# Altium PCB PCB1.PcbDoc
Units mm, origin at the board's own origin, x right, y up, seen from the top; angles counter-clockwise.
Board outline 41.25 x 41.25 mm, 4 copper layers (first layer (signal), second layer (GND), third layer (GND), fourth layer (signal)), stack 1.57 mm thick; 35 components, 27 nets, 170 pads, 130 vias.
Unrouted connection lines stored in the file: 6.
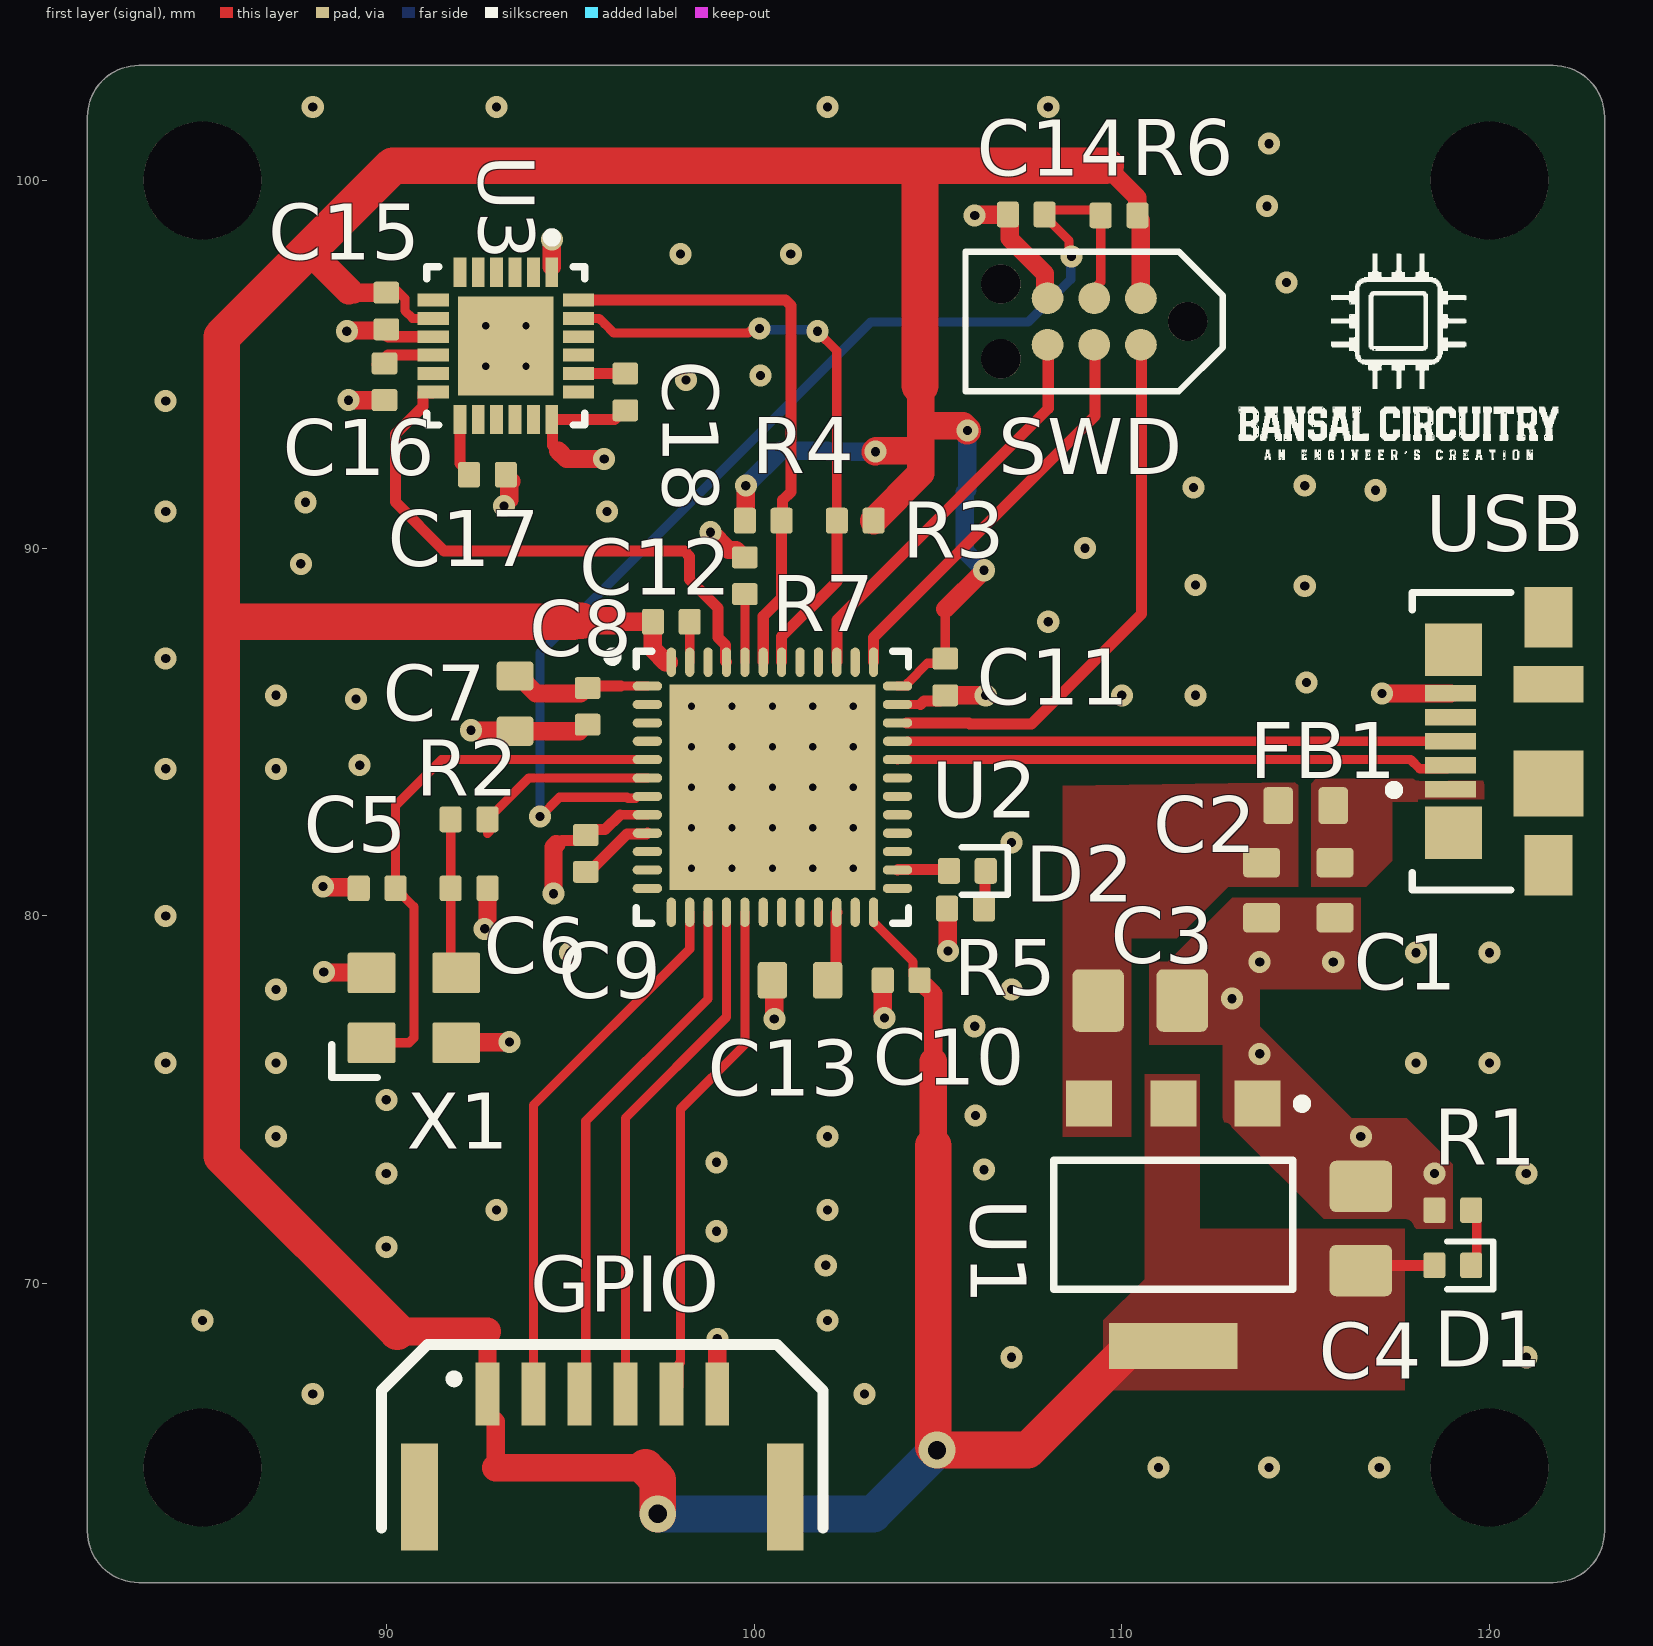
[diagram p0: first layer (signal) view]
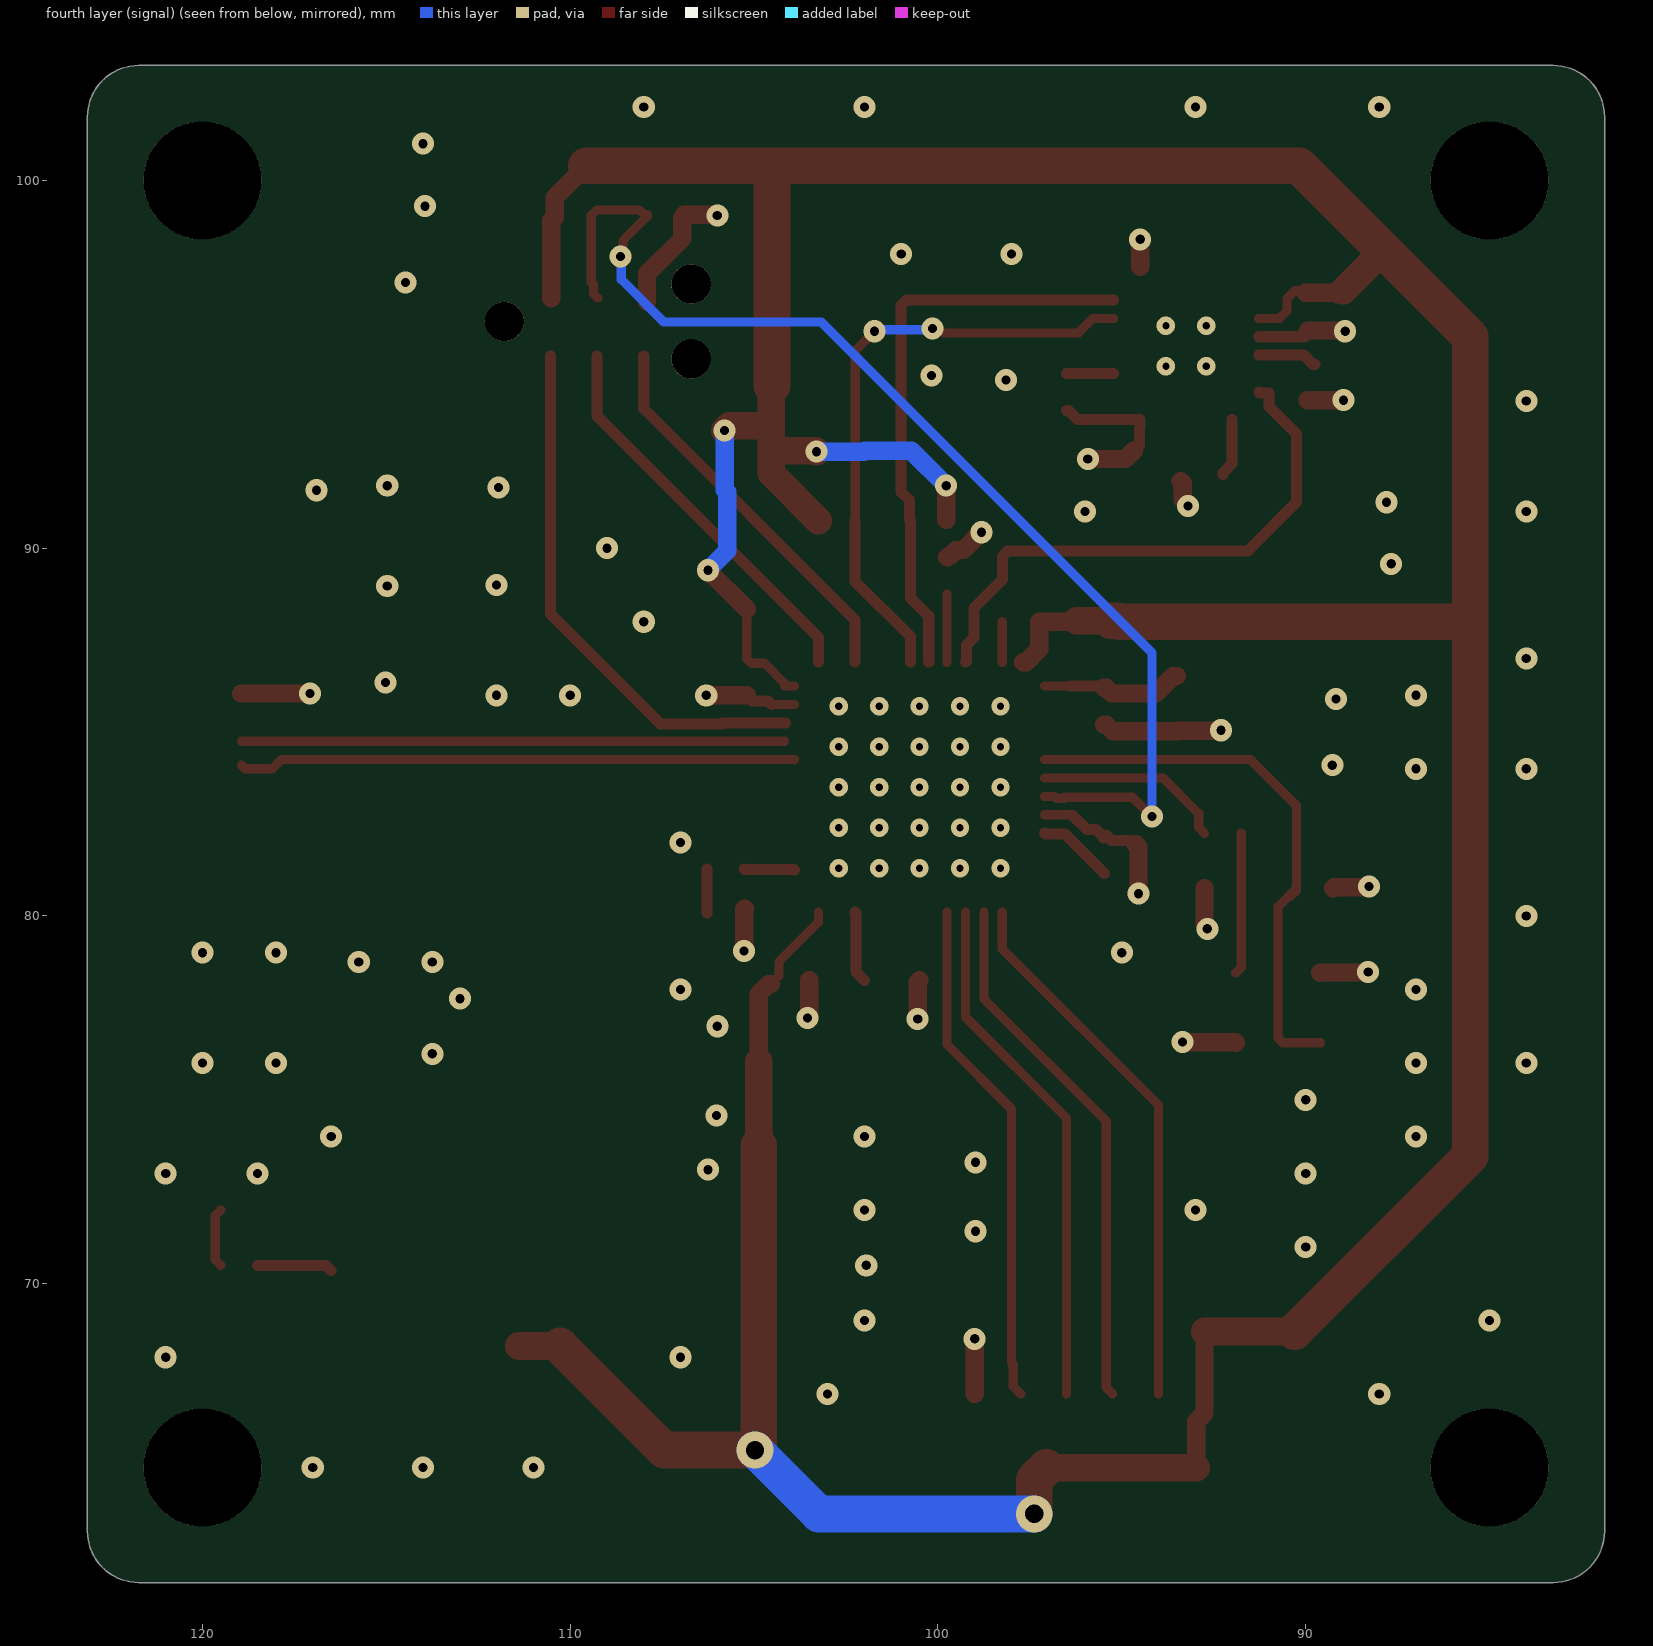
[diagram p1: fourth layer (signal) view, seen from below]
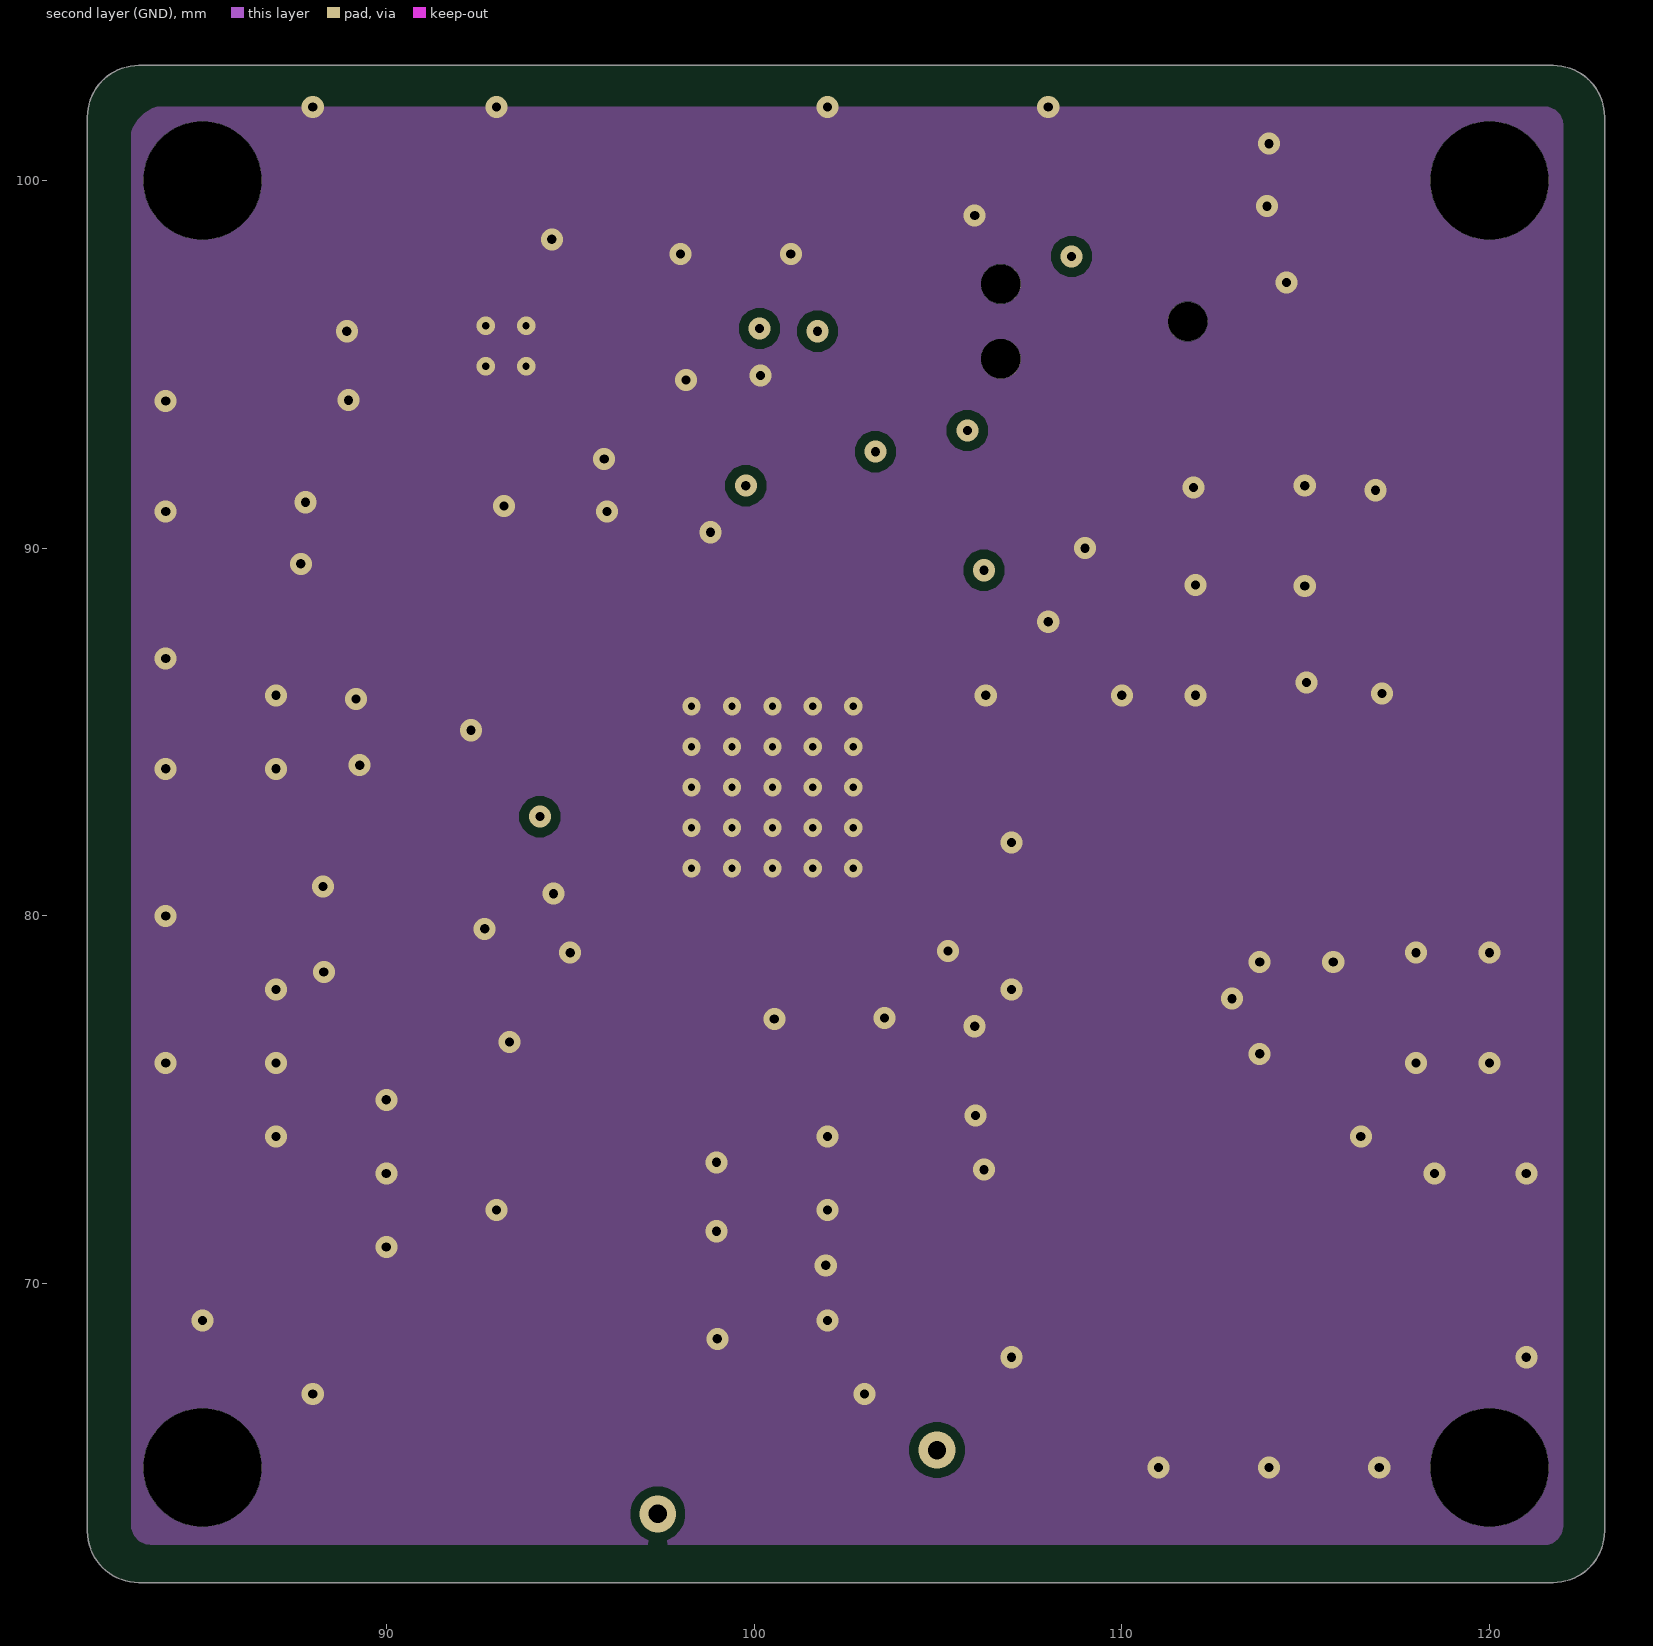
[diagram p2: second layer (GND)]
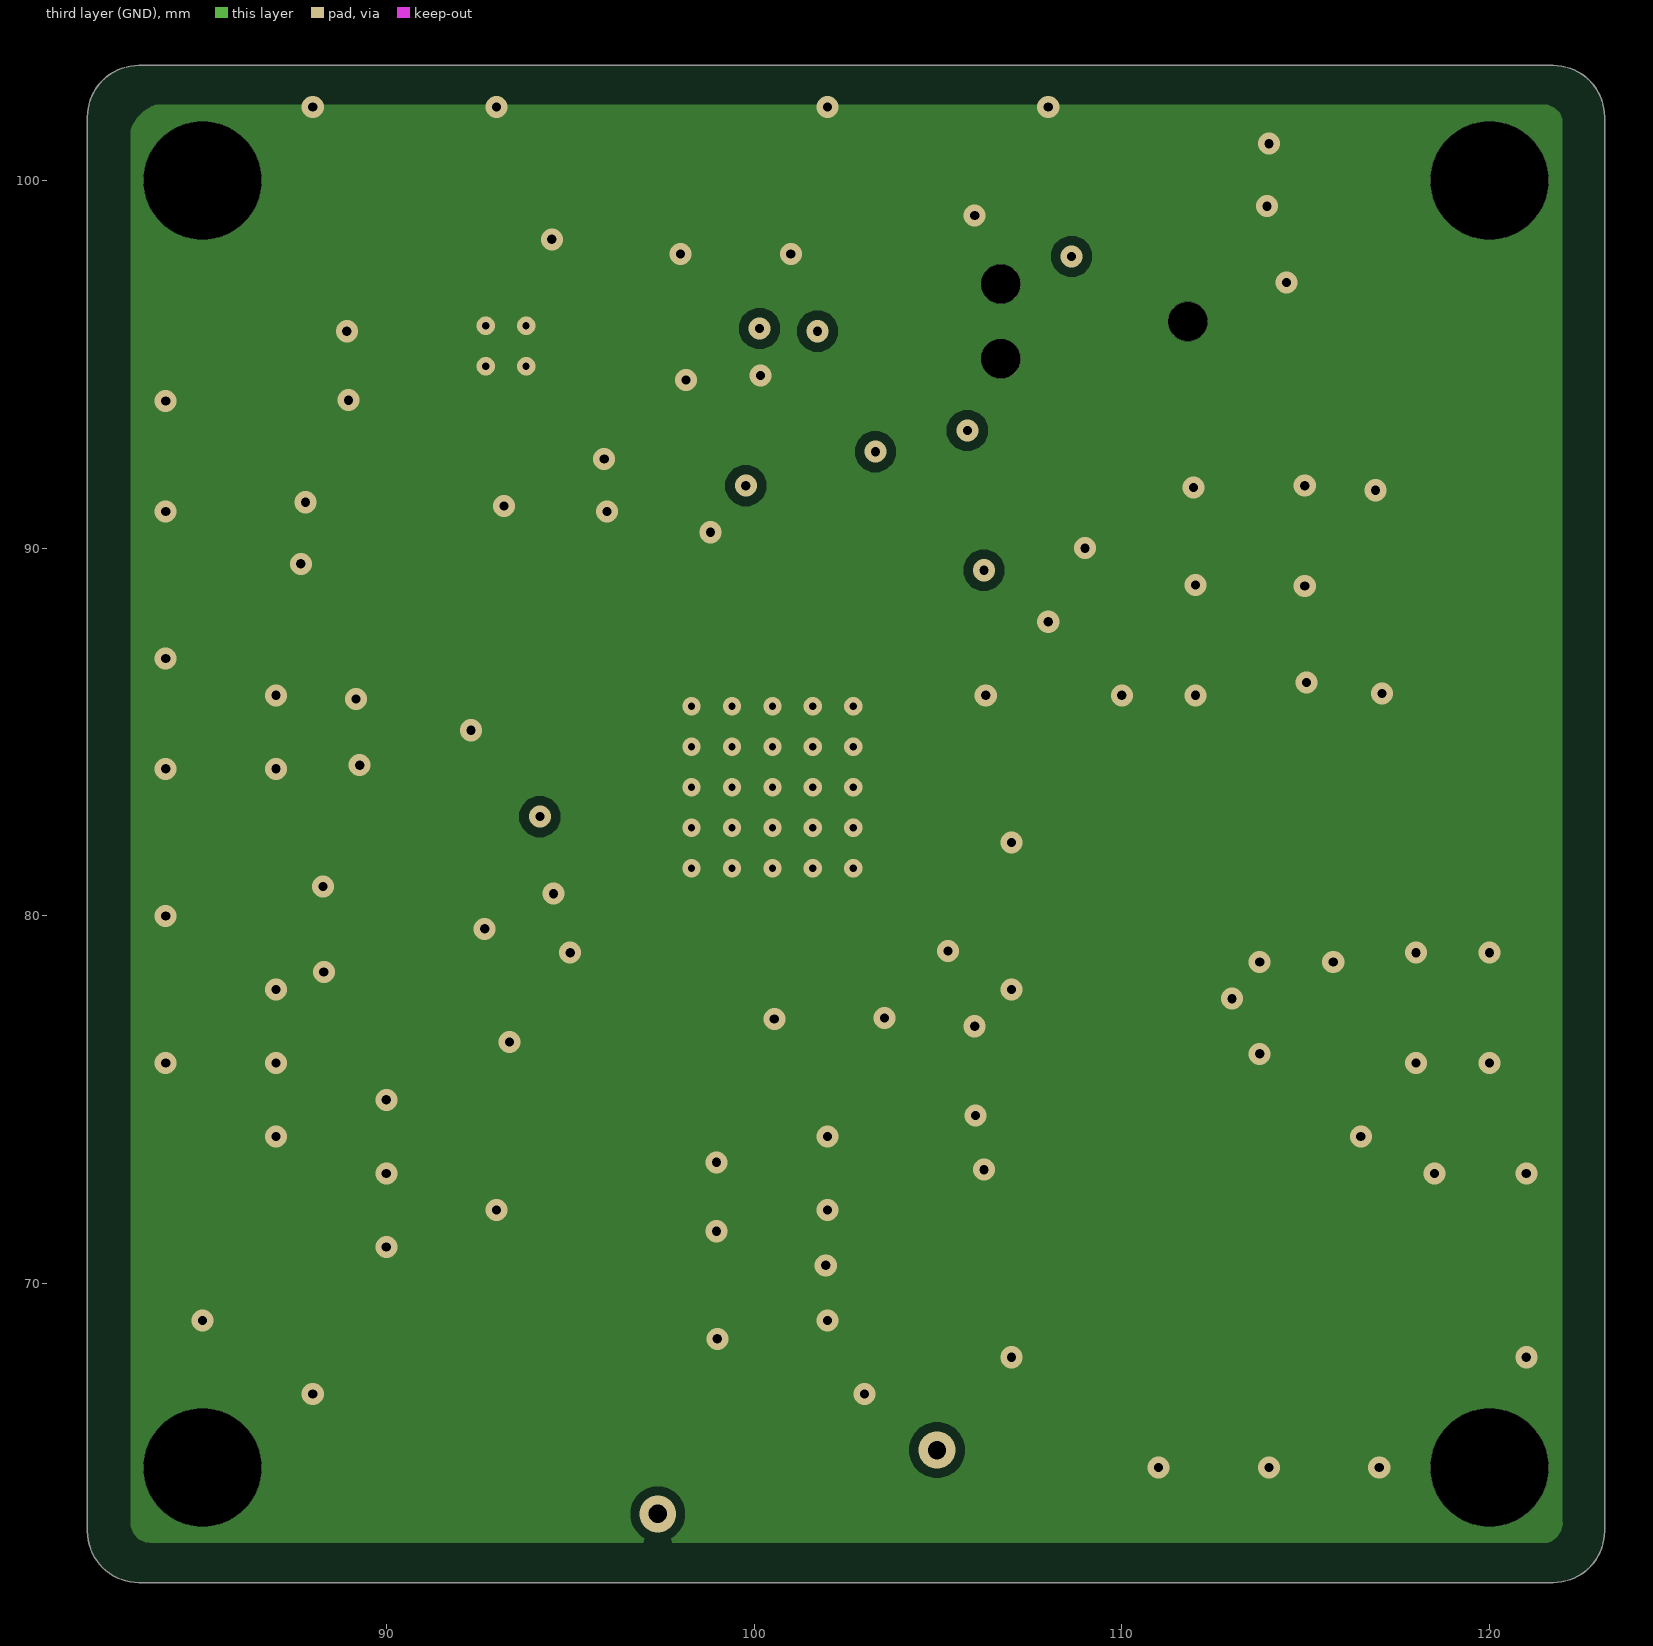
[diagram p3: third layer (GND)]
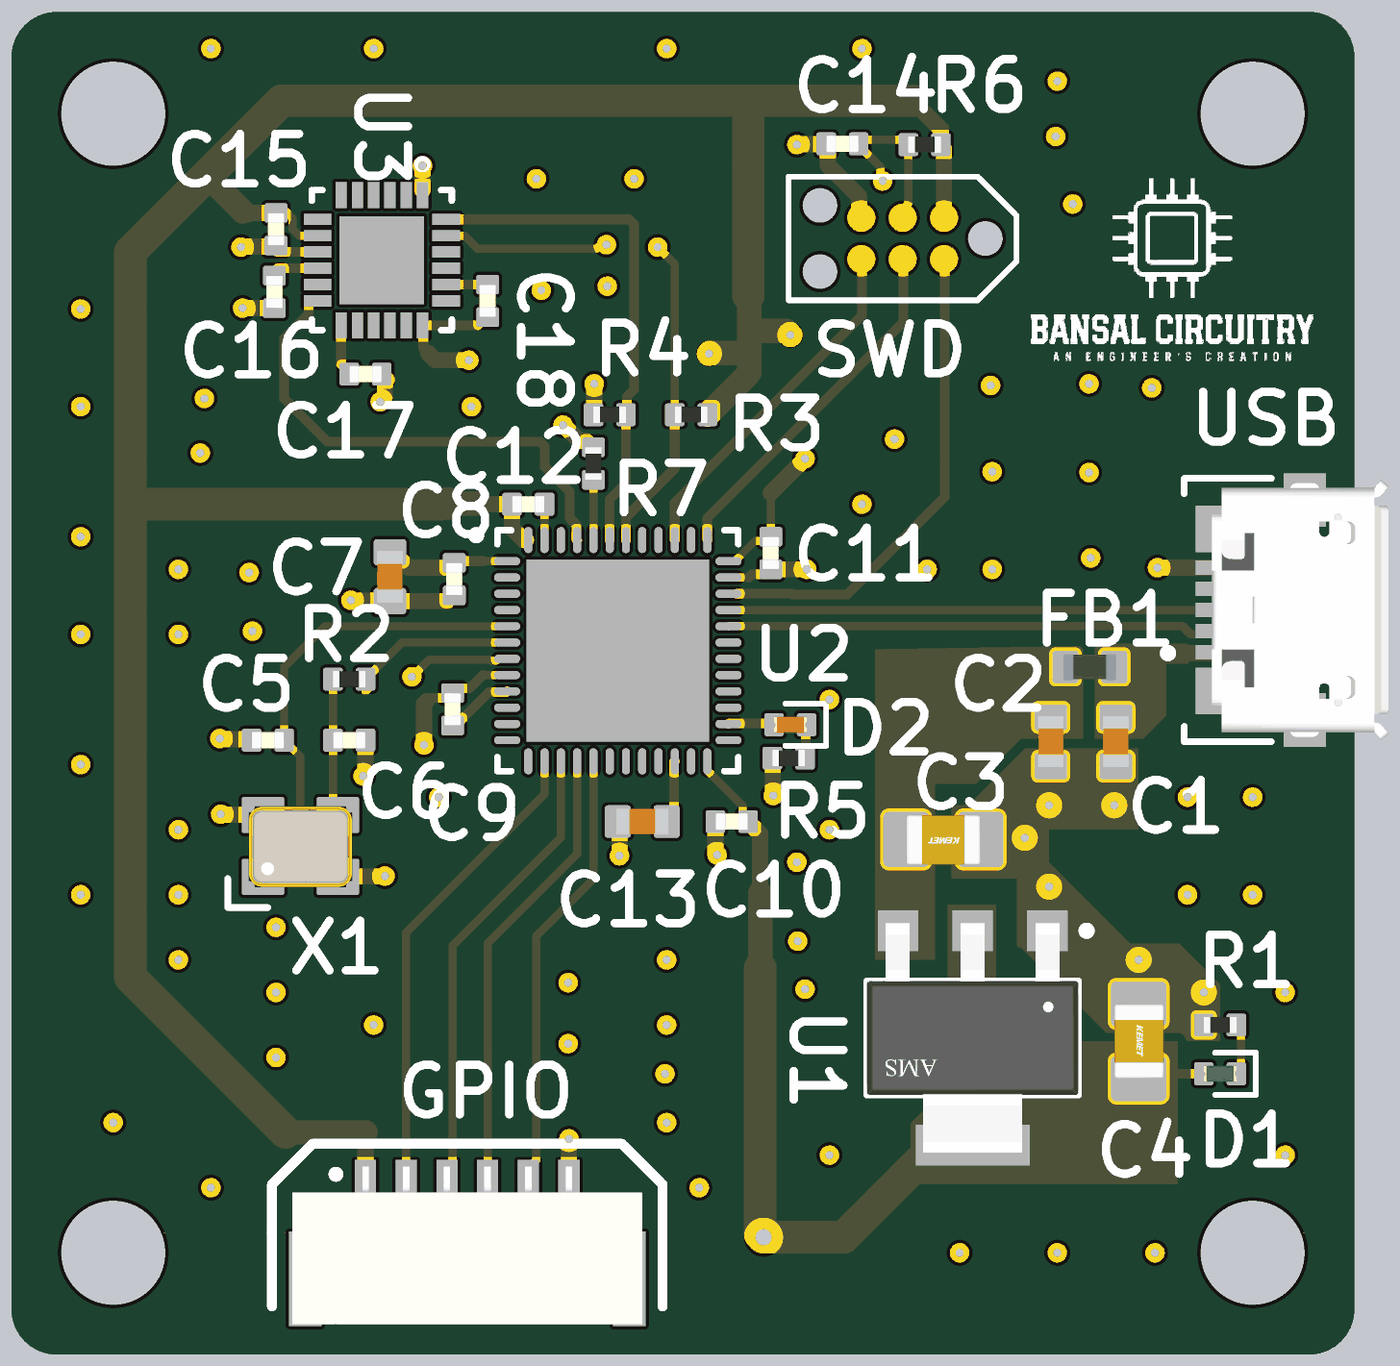
[diagram p4: 3D render of the assembled board from above, using the file's embedded part models]

## Layer stack, top to bottom
Top Solder: solder mask 0.0254, SM-001, Dk 4
first layer (signal): signal copper 0.035
Dielectric 1: prepreg 0.2, PP-017, Dk 4.6
second layer (GND): signal copper 0.0175
Dielectric 3: core 1.065, Core-039, Dk 4.6
third layer (GND): signal copper 0.0175
Dielectric 5: prepreg 0.2, PP-017, Dk 4.6
fourth layer (signal): signal copper 0.035
Bottom Solder: solder mask 0.0254, SM-001, Dk 4

## Board outline
81.873,63.27 81.873,101.586 81.873,101.73 cw(c83.27,101.73) 83.27,103.127 121.73,103.127 cw(c121.73,101.73) 123.127,101.73 123.127,63.27 cw(c121.73,63.27) 121.73,61.873 83.27,61.873 cw(c83.27,63.27)

## Design rules (kind name [scope] priority, off if disabled: settings)
Clearance Clearance_1 [All] p1: gap=0.2 ignorepadtopadclearanceinfootprint=FALSE except(0: THPad-Hole Via-Hole Fill-Hole Poly-Hole Region-Hole Hole-Hole; 0.254: THPad-THPad THPad-Via THPad-Fill THPad-Poly THPad-Region Via-Via Via-Fill Via-Poly Via-Region Fill-Fill Fill-Poly Fill-Region Poly-Poly Poly-Region Region-Region)
Clearance Clearance_1 [(ExistsOnLayer('second layer (GND)') Or ExistsOnLayer('third layer (GND)')) vs (ExistsOnLayer('second layer (GND)') Or ExistsOnLayer('third layer (GND)'))] p2: gap=0.254 ignorepadtopadclearanceinfootprint=FALSE sourcerule=40 cellrowname=All cellrowtype=0 cellcolname=All cellcoltype=0 innerlayers=TRUE
Clearance Clearance_2 [(ExistsOnLayer('first layer (signal)') Or ExistsOnLayer('fourth layer (signal)')) vs (ExistsOnLayer('first layer (signal)') Or ExistsOnLayer('fourth layer (signal)'))] p3: gap=0.254 ignorepadtopadclearanceinfootprint=FALSE sourcerule=40 cellrowname=All cellrowtype=0 cellcolname=All cellcoltype=0 outerlayers=TRUE
Clearance [All] p4: gap=0.254 ignorepadtopadclearanceinfootprint=FALSE ismatrix=TRUE
DiffPairsRouting DifferentialPairsRouting_2 [All] p1: maxlimit=0.254 minlimit=0.208 mostfreqgap=0.254 toplayer_maxgap=0.208 toplayer_prefgap=0.208 toplayer_minwidth=0.264 toplayer_maxwidth=0.264 toplayer_prefwidth=0.264 bottomlayer_maxgap=0.208 bottomlayer_prefgap=0.208 bottomlayer_minwidth=0.264 bottomlayer_maxwidth=0.264 bottomlayer_prefwidth=0.264 impedanceprofiledriven=TRUE impedanceprofileid={7BBD9D1F-3048-41EA-9518-500ADC09A924} impedanceprofilevalue=90.000000 maxuncoupledlength=0.254
DiffPairsRouting [All] p2: maxlimit=0.254 minlimit=0.254 mostfreqgap=0.254 toplayer_minwidth=0.381 toplayer_maxwidth=0.381 toplayer_prefwidth=0.381 midlayer1_minwidth=0.381 midlayer1_maxwidth=0.381 midlayer1_prefwidth=0.381 midlayer2_minwidth=0.381 midlayer2_maxwidth=0.381 midlayer2_prefwidth=0.381 bottomlayer_minwidth=0.381 bottomlayer_maxwidth=0.381 bottomlayer_prefwidth=0.381 maxuncoupledlength=12.7
PolygonConnect [All] p1: connectstyle=Direct reliefconductorwidth=0.254 reliefentries=4 polygonreliefangle="90 Angle" airgapwidth=0.254
RoomDefinition Sheet1 [InComponentClass('Sheet1')] p1: confinementstyle=ConfineIn formatcopy=TRUE lockcomponents=FALSE outline 276.5,42.5 466.365,42.5 466.365,57.74 276.5,57.74
RoutingVias RoutingViaStyle_1 [All] p1: holewidth=0.3 width=0.7 viastyle="Through Hole" minholewidth=0.25 minwidth=0.55 maxholewidth=0.4 maxwidth=0.9
RoutingVias [All] p2: holewidth=0.711 width=1.27 viastyle="Through Hole" minholewidth=0.711 minwidth=1.27 maxholewidth=0.711 maxwidth=1.27
SolderMaskExpansion [All] p1: expansion=0.102 istentingtop=FALSE
Width MaxMinWidth_1 [All] p1: maxlimit=1 minlimit=0.25 preferedwidth=0.3 minimp=50.000000 maximp=50.000000 favimp=50.000000
29 further rules are at their usual default settings.

## Components (designator, comment, footprint, x,y, rotation, side; value= is the part's Value field where it differs from the comment)
C1 "2.2uf" CAP_0603 115.8,80.7 r90 top
C2 "2.2uf" CAP_0603 113.8,80.7 r90 top
C3 "22uf" CAP_0805 110.5,77.7 r180 top
C4 "22uf" CAP_0805 116.5,71.5 r270 top
C5 "5pf" CAP_0402 89.75,80.75 r0 top
C6 "5pf" CAP_0402 92.25,80.75 r180 top
C7 "2.2uf" CAP_0603 93.5,85.775 r90 top
C8 "100nf" CAP_0402 95.475,85.7 r90 top
C9 "100nf" CAP_0402 95.425,81.7 r270 top
C10 "100nf" CAP_0402 104,78.25 r0 top
C11 "100nf" CAP_0402 105.2,86.5 r90 top
C12 "100nf" CAP_0402 97.75,88 r180 top
C13 "2.2uf" CAP_0603 101.25,78.25 r0 top
C14 "100nf" CAP_0402 107.4,99.075 r0 top
C15 "100nf" CAP_0402 90,96.45 r90 top
C16 "100nf" CAP_0402 89.95,94.525 r90 top
C17 "10nf" CAP_0402 92.75,92 r180 top
C18 "2.2nf" CAP_0402 96.5,94.25 r90 top
D1 "GREEN" LED_0402_GREEN 119,70.5 r0 top
D2 "RED" LED_0402_RED 105.8,81.225 r0 top
FB1 "FB0603" FB_0603 115,83 r180 top
GPIO "SM06B-GHS-TB" SM06B-GHS-TB 95.875,65.6 r0 top (schematic designator J3)
R1 "10K" RES_0402 119,72 r0 top
R2 "0R" RES_0402 92.25,82.625 r0 top
R3 "2.2K" RES_0402 102.75,90.75 r0 top
R4 "2.2K" RES_0402 100.25,90.75 r180 top
R5 "10K" RES_0402 105.75,80.2 r0 top
R6 "10k" RES_0402 109.925,99.05 r180 top
R7 "10k" RES_0402 99.75,89.25 r90 top
SWD "TC2030-NL" TC2030-NL-FP 109.25,96.166 r180 top (schematic designator J2)
U1 "AMS1117-3.3" FP-AMS1117-IPC_C 111.4,71.6 r270 top
U2 "STM32F411CEU6" STM-UFQFPN48_L 100.5,83.5 r0 top
U3 "MPU-6050" IS-QFN-24_V 93.25,95.5 r270 top
USB "473460001" FP-473460001-MFG 121.25,84.75 r90 top (schematic designator J1)
X1 "24MHz" XTAL_3225 90.75,77.5 r0 top

## Footprints (in the part's own frame and the unit in brackets; to place one, negate y for a bottom-side part, rotate by r counter-clockwise, add the part's x,y. Pads: shape width x height; smd on the part's side, far side on the other; paste and mask are expansions set on the pad)
CAP_0402 [mm]
  rrect25% 0.6x0.7 smd: 1(-0.5,0) 2(0.5,0)
  body extent -0.5,-0.26 0.5,0.26, height 0.37
CAP_0603 [mm]
  rrect25% 0.8x1 smd: 1(-0.75,0) 2(0.75,0)
  body extent -0.8,-0.4 0.8,0.4, height 0.51
CAP_0805 [mm]
  rrect25% 1.4x1.7 smd: 1(-1.143,0) 2(1.143,0)
  body extent -1.15,-0.76 1.15,0.79, height 1.01
FB_0603 [mm]
  rrect25% 0.8x1 smd: 1(-0.75,0) 2(0.75,0)
  body extent -0.8,-0.4 0.8,0.4, height 0.81
FP-473460001-MFG [mm]
  rect 0.45x1.38 smd paste+0 mask+0: 1(-1.3,2.31) 2(-0.65,2.31) 3(0,2.31) 4(0.65,2.31) 5(1.3,2.31)
  rect 1.425x1.55 smd paste+0 mask+0: 6(-2.488,2.225) 7(2.488,2.225)
  rect 1.65x1.3 smd paste+0 mask+0: 8(-3.375,-0.35) 11(3.375,-0.35)
  rect 1.8x1.9 smd paste+0 mask+0: 9(-1.15,-0.35)
  rect 1x1.9 smd paste+0 mask+0: 10(1.55,-0.35)
  silkscreen extent -4.05,0.67 4.05,3.97, body extent -4.3,-2.48 4.3,3.45, height 0.25
FP-AMS1117-IPC_C [mm]
  rect 1.25x1.25 smd paste+0 mask+0: 1(-3.295,2.29) 2(-3.295,0) 3(-3.295,-2.29)
  rect 1.25x3.5 smd paste+0 mask+0: 4(3.295,0)
  silkscreen extent -3.42,-3.25 1.75,3.63, body extent -3.9,-3.35 3.9,3.35, height 0.25
IS-QFN-24_V [mm] "QFN, 24-Leads, Body 4x4mm, Pitch 0.5mm, Thermal Pad 2.7x2.6mm"
  rect 0.8x0.35 smd: 1(-2,1.25) 2(-2,0.75) 3(-2,0.25) 4(-2,-0.25) 5(-2,-0.75) 6(-2,-1.25) 13(2,-1.25) 14(2,-0.75) 15(2,-0.25) 16(2,0.25) 17(2,0.75) 18(2,1.25)
  rect 0.35x0.85 smd mask+0.102: 7(-1.25,-1.975) 8(-0.75,-1.975) 9(-0.25,-1.975) 10(0.25,-1.975) 11(0.75,-1.975) 12(1.25,-1.975) 19(1.25,1.975) 20(0.75,1.975) 21(0.25,1.975) 22(-0.25,1.975) 23(-0.75,1.975) 24(-1.25,1.975)
  rect 2.7x2.6 smd: 25(0,0)
  silkscreen extent -3.07,-2.15 2.15,2.15, body extent -2,-2 2,2, height 0.95
LED_0402_GREEN [mm]
  rrect25% 0.6x0.7 smd: A(-0.5,0) K(0.5,0)
  silkscreen extent -0.15,-0.65 1.1,0.65, body extent -0.51,-0.25 0.51,0.25, height 0.45
LED_0402_RED [mm]
  rrect25% 0.6x0.7 smd: A(-0.5,0) K(0.5,0)
  silkscreen extent -0.15,-0.65 1.1,0.65, body extent -0.51,-0.25 0.51,0.25, height 0.45
RES_0402 [mm]
  rrect25% 0.6x0.7 smd: 1(-0.5,0) 2(0.5,0)
  body extent -0.5,-0.25 0.5,0.25, height 0.3
SM06B-GHS-TB [mm]
  rect 0.65x1.7 smd: 1(-3.125,1.4) 2(-1.875,1.4) 3(-0.625,1.4) 4(0.625,1.4) 5(1.875,1.4) 6(3.125,1.4)
  rect 1x2.9 smd: ""(-4.975,-1.4) ""(4.975,-1.4)
  silkscreen extent -6,-2.25 6,2.75, body extent -5.38,-2.8 5.38,2.05, height 4.26
STM-UFQFPN48_L [mm] "QFN, 48-Leads, Body 7.1x7.1mm, Pitch 0.5mm, Thermal Pad 5.6x5.6mm, IPC High Density"
  oval 0.8x0.25 smd: 1(-3.4,2.75) 2(-3.4,2.25) 3(-3.4,1.75) 4(-3.4,1.25) 5(-3.4,0.75) 6(-3.4,0.25) 7(-3.4,-0.25) 8(-3.4,-0.75) 9(-3.4,-1.25) 10(-3.4,-1.75) 11(-3.4,-2.25) 12(-3.4,-2.75) 25(3.4,-2.75) 26(3.4,-2.25) 27(3.4,-1.75) 28(3.4,-1.25) 29(3.4,-0.75) 30(3.4,-0.25) 31(3.4,0.25) 32(3.4,0.75) 33(3.4,1.25) 34(3.4,1.75) 35(3.4,2.25) 36(3.4,2.75)
  oval 0.25x0.8 smd: 13(-2.75,-3.4) 14(-2.25,-3.4) 15(-1.75,-3.4) 16(-1.25,-3.4) 17(-0.75,-3.4) 18(-0.25,-3.4) 19(0.25,-3.4) 20(0.75,-3.4) 21(1.25,-3.4) 22(1.75,-3.4) 23(2.25,-3.4) 24(2.75,-3.4) 37(2.75,3.4) 38(2.25,3.4) 39(1.75,3.4) 40(1.25,3.4) 41(0.75,3.4) 42(0.25,3.4) 43(-0.25,3.4) 44(-0.75,3.4) 45(-1.25,3.4) 46(-1.75,3.4) 47(-2.25,3.4) 48(-2.75,3.4)
  rect 5.6x5.6 smd: 49(0,0)
  silkscreen extent -4.47,-3.7 3.7,3.7, body extent -3.55,-3.55 3.55,3.55, height 0.6
TC2030-NL-FP [mil]
  round 33.98 smd paste-16.99: 1(-50,-25) 2(-50,25) 3(0,-25) 4(0,25) 5(50,-25) 6(50,25)
  round 42.01 hole 42.01 unplated: MH(-100,0) MH(100,-40) MH(100,40)
  silkscreen extent -138,-75 138,75
XTAL_3225 [mm]
  rrect10% 1.3x1.1 smd: 1(-1.15,-0.95) 2(1.15,-0.95) 3(1.15,0.95) 4(-1.15,0.95)
  silkscreen extent -2.23,-1.89 -1,-1, body extent -1.6,-1.28 1.6,1.22, height 0.61

## Part data
C1 C2 C7 C13: library part CAP_0603, "Capacitor SMD 0603"
C3 C4: library part CAP_0805, "Capacitor SMD 0805"
C5 C6 C8 C9 C10 C11 C12 C14 C15 C16 C17 C18: library part CAP_0402, "Capacitor SMD 0402"
D1: library part LED_0402_GREEN, "LED 0402 GREEN SMD"
D2: library part LED_0402_RED, "LED 0402 RED SMD"
FB1: library part FB_0603, "Ferrite Bead SMD 0603"
GPIO: "Header Connector 6 Position 1.25MM Pitch SMD Horizontal JST GH", Manufacturer=JST, Manufacturer Part Number=SM06B-GHS-TB
R1 R2 R3 R4 R5 R6 R7: library part RES_0402, "Resistor SMD 0402"
SWD: "Tag-Connect No-Solder SWD Debug Connector (No Legs) DO NOT PLACE", Manufacturer=Tag-Connect, Manufacturer Part Number=TC2030-NL-FP
U1: library part CMP-209535-000001-1, "LDO Voltage Regulators 1A, 3.3V", Dropout Voltage=1.1V, Manufacturer="Advanced Monolithic Systems", Max Junction Temp=+125°C, Max Power Dissipation=1.2W, Max Supply Voltage=15V, Nominal Supply Current=5mA, Output Current=1A, Output Voltage=3.3V, Package=AMS1117, Temperature="-40°C to +125°C", Temperature Range Low=-40°C, Automotive=No, Category=IC, ComponentLink2Description=Datasheet, ComponentLink2URL=http://www.advanced-monolithic.com/pdf/ds1117.pdf, Device Class L1="Integrated Circuits (ICs)", Device Class L2="Power Management ICs", Device Class L3="Voltage Regulators - Linear", Height=1.8mm, Ipc Land Pattern Name=SOT229P700X180-4, Lead Free=Yes, Manufacturer Part Number=AMS1117-3.3, Number Of Outputs=1, Octopart=https://octopart.com/ams1117-3.3-advanced+monolithic+systems-25899300, Output Type=Fixed, RoHS=TRUE, Standoff Height=0.64mm, Temperature Range High=+125°C
U2: library part CMP-0243-00165-1, "ARM Cortex-M4 32-bit MCU+FPU, 512 KB Flash, 128 KB RAM, 36 I/Os, 48-Pin UFQFPN, -40 to 85 degC, Tray", I/Os (High Current)=36, Operating Frequency(F) (Processor speed) (MHz)=100, Package Description=UFQFPN48, Package Reference="48-Pin Ultra Thin Fine Pitch Quad Flat No-Lead, 7 x 7 x 0.6 mm Body, 0.5 mm Pitch, Exposed Pad", Supply Voltage(Vcc) min (V)=1.7, ComponentLink1Description="Manufacturer URL", ComponentLink1URL=http://www.st.com/, ComponentLink2Description=Datasheet, ComponentLink2URL=http://www.st.com/st-web-ui/static/active/en/resource/technical/document/datasheet/DM00115249.pdf, Core="ARM Cortex-M4", DatasheetVersion="Rev. 6", FLASH Size (Prog) (kB)=512, Internal RAM Size (kB)=128, Mounting Technology="Surface Mount", Packing=Tray
U3: library part CMP-1753-00002-2, "3-Axis Gyroscope, Accelerometer and a Digital Motion Processor(TM) (DMP), 2.375 to 3.46 V, -40 to 85 degC, 24-Pin QFN, RoHS, Tape and Reel", Manufacturer=InvenSense, Standard Package=5,000, Category=Sensors,Transducers, Datasheet URL=http://datasheet.octopart.com/MPU-6050-InvenSense-datasheet-14421344.pdf, Datasheet Version="Rev. 3.3, 05/2012", Dynamic Catalog=MPU-6000™Series, Family=Multifunction, Featured Product=MPU-60506-Axis,IntegratedI²CSolution, Manufacturer URL=http://www.invensense.com/, Online Catalog=MPU-6000™Series, Other Names="1428-1007-2 / MPU6050", Output Type=Digital, Sensor Type=MotionTracking, Unit PriceUSD=Digital
USB: library part CMP-2000-05246-2, "CONN RCPT USB2.0 MICRO B SMD R/A", Current Rating=1.8A, Manufacturer=Molex, Package=0, Temperature="-30°C to +85°C", Temperature Range High=+85°C, Temperature Range Low=-30°C, Voltage Rating=30V, Automotive=No, Category=Conn, ComponentLink2Description=Datasheet, ComponentLink2URL=https://www.molex.com/webdocs/datasheets/pdf/en-us/0473460001_IO_CONNECTORS.pdf, Conn Orientation="Right Angle", Contact Material=Gold,Nickel, Device Class L1=Connectors, Device Class L2="USB Connectors", Device Class L3=unset, Digikey Description="CONN RCPT USB2.0 MICRO B SMD R/A", Footprint Url=https://www.molex.com/pdm_docs/sd/473460001_sd.pdf, Height=2.945mm, Is Female=yes, Lead Free=Yes, Manufacturer Part Number=473460001, Number Of Contacts=5, Octopart=https://octopart.com/47346-0001-molex-7164928, Pitch=0.65mm, RoHS=TRUE, Shielding=true, Usb Standard="USB 2.0"
X1: library part TSX-3225_24.0000MF15X-AC, "Crystal SMD 24MHz 10PPM 7pF 3225", Manufacturer=Epson, Manufacturer Part Number="TSX-3225 24.0000MF15X-AC"

## Free pads (board coordinates)
  round 3.2 hole 3.2 unplated: MH(85,65) MH(85,100) MH(120,65) MH(120,100)

## Via types
v1: diameter 0.6, hole 0.25, first layer (signal) to fourth layer (signal), 99 vias
v2: diameter 0.5, hole 0.2, first layer (signal) to fourth layer (signal), 29 vias
v3: diameter 1, hole 0.5, first layer (signal) to fourth layer (signal), 2 vias

## Nets (pads, with @x,y where several pads share a name; then routed paths per layer and width w, separated by ;. In a path a pad name is that pad's centre, name@x,y a point inside that pad or via, vN(x,y) a via of type N, cw(c..) or ccw(c..) an arc to the next point about the centre after c; other vN are vias at no path point)
3.3v: C4.2 C7.2 C8.2 C9.2 C10.2 C11.2 C12.2 C15.2 C17.2 D1.A GPIO.1 R3.2 R4.2 R6.1 SWD.1 U1.2 U1.4 U2.1 U2.9 U2.24 U2.36 U2.48 U3.8 U3.13 | length 155.2
  first layer (signal) w0.25: 89.125,96.9 89.175,96.95 ; C15.2@90.022,97 90.293,97 90.504,96.789 90.504,96.461 90.715,96.25 U3.8 ; 96.375,86.25 U2.1 ; U2.24 103.25,79.825 104.325,78.75 104.325,78.375 C10.2@104.55,78.15 ; U2.36 104.175,86.25 104.175,86.331 104.714,86.87 105.07,86.87 C11.2 105.2,88.345
  first layer (signal) w0.3: U3.13 92,92.3 92.25,92.05 C17.2 ; C9.2@95.471,81.154 96.542,82.225 97.075,82.225 U2.9 ; C8.2 95.525,86.25 96.375,86.25 ; C4.2 116.643,70.5 D1.A
  first layer (signal) w0.5: 87.85,98.075 87.9,98.075 ; 88.975,97 89.025,97 89.125,96.9 ; 89.175,96.95 C15.2 ; 92.75,68.7 GPIO.1 92.75,66.475 92.975,66.25 92.975,65 ; C7.2 93.6,86.525 94.075,86.05 95.275,86.05 95.425,86.2 C8.2 ; 96.25,88 C12.2 97.25,87.25 97.6,86.9 U2.48@97.675,86.9 ; R4.2@99.775,90.775 v1(99.775,91.7) ; C10.2@104.55,78.15 104.6,78.15 104.875,77.875 104.875,76.05 ; 105.2,88.345 106.25,89.395 v1(106.25,89.4) ; 109.556,100.4 110.425,99.531 R6.1 110.425,99 110.52,98.905 SWD.1
  first layer (signal) w0.75: 87.9,98.075 88.975,97 ; 90.3,68.7 92.75,68.7 ; 92.975,65 97.05,65 ; 95.3,88.025 96.225,88.025 ; R3.2 104.536,92.036 104.536,92.65 ; v1(103.3,92.625) 103.325,92.65 104.536,92.65 ; 104.536,94.4 104.536,93.325 ; 104.875,73.75 104.875,76.05 ; v1(105.8,93.2) 105.675,93.325 104.536,93.325 ; U1.4@110.275,68.305 U1.4 ; 104.536,92.65 104.536,93.325
  first layer (signal) w1: 90.3,68.7 85.525,73.475 85.525,88 ; 95.3,88.025 95.1,88.025 95.075,88 85.525,88 ; 97.05,65 97.381,64.669 v3(97.381,63.739) ; 104.511,94.425 104.511,100.4 ; 104.875,73.75 104.875,65.575 v3(104.975,65.475) 107.445,65.475 U1.4@110.275,68.305 ; 109.556,100.4 104.511,100.4 ; 85.525,88 85.525,95.75 87.85,98.075 90.175,100.4 104.511,100.4
  fourth layer (signal) w0.5: v1(99.775,91.7) 100.725,92.65 101.986,92.65 102.011,92.625 v1(103.3,92.625) ; v1(105.8,93.2) 105.8,91.592 105.725,91.517 105.725,89.936 106.25,89.411 v1(106.25,89.4)
  fourth layer (signal) w1: v3(97.381,63.739) 103.239,63.739 v3(104.975,65.475)
5V: C2.2 C3.2 FB1.2 U1.3
GND: C1.1 C2.1 C3.1 C4.1 C5.1 C6.1 C7.1 C8.1 C9.1 C10.1 C11.1 C12.1 C13.1 C14.1 C15.1 C16.1 C17.1 C18.1 GPIO.6 R1.1 R5.1 R7.2 SWD.5 U1.1 U2.8 U2.23 U2.35 U2.47 U2.49 U3.1 U3.9 U3.11 U3.18 U3.25 USB.5 X1.2 X1.4 | length 36.5
  first layer (signal) w0.25: 96.35,82.75 U2.8 ; U2.47 C12.1 ; U2.35 104.525,85.75
  first layer (signal) w0.3: C15.1@89.925,95.875 90.05,95.75 U3.9 ; C15.1@89.95,95.9 C15.1 ; 94.625,81.95 94.683,81.95 94.783,82.05 95.275,82.05 C9.1 ; 94.671,92.65 94.525,92.796 94.525,93.25 94.5,93.275 U3.18 96.2,93.5 96.45,93.75 C18.1 ; C9.1@95.5,82.125 95.5,82.15 95.7,82.35 95.95,82.35 96.35,82.75 ; 104.525,85.75 104.625,85.85 105.05,85.85 C11.1
  first layer (signal) w0.5: v1(88.275,80.8) 88.294,80.781 89.219,80.781 C5.1 ; v1(88.3,78.475) 88.313,78.462 89.587,78.462 X1.4 ; v1(88.925,95.9) 88.944,95.919 89.931,95.919 C15.1@89.95,95.9 ; v1(88.975,94.025) C16.1 ; X1.2 91.912,76.563 93.338,76.563 v1(93.35,76.575) ; v1(92.3,85.05) 92.313,85.038 93.488,85.038 C7.1 C8.1@95.25,85.025 ; v1(92.675,79.65) 92.675,79.677 92.75,79.752 C6.1 ; v1(93.2,91.15) 93.2,91.177 93.344,91.321 93.344,91.769 C17.1@93.4,91.824 ; U3.1@94.5,97.65 v1(94.5,98.4) ; v1(94.546,80.604) 94.546,81.871 94.625,81.95 ; 94.677,92.65 94.902,92.425 v1(95.925,92.425) ; C8.1@95.425,85.2 C8.1 ; v1(98.817,90.433) 98.824,90.433 99.308,89.95 99.5,89.95 99.65,89.8 99.7,89.8 R7.2 ; GPIO.6 v1(99,68.5) ; C13.1 100.55,78.2 v1(100.55,77.2) ; C10.1 103.5,77.302 103.55,77.252 v1(103.55,77.225) ; C11.1 v1(106.3,86) ; R5.1 105.262,80.188 105.262,79.062 v1(105.275,79.05) ; v1(106,99.05) 106.012,99.062 C14.1@106.9,99.062 ; C14.1@106.95,98.975 106.95,98.425 107.911,97.464 SWD.5@107.911,96.704 ; v1(117.077,86.05) USB.5
  other v1: 111,65 114,65 117,65 88,67 103,67 107,68 121,68 85,69 102,69 101.95,70.5 90,71 98.975,71.425 93,72 102,72 90,73 118.5,73 121,73 106.25,73.1 98.975,73.3 87,74 102,74 116.5,74 106.025,74.575 90,75 84,76 87,76 118,76 120,76 113.75,76.25 106,77 113,77.75 87,78 107,78 113.75,78.75 115.75,78.75 95,79 118,79 120,79 84,80 107,82 84,84 87,84 89.275,84.1 89.175,85.9 87,86 110,86 112,86 115.025,86.35 84,87 108,88 114.975,88.975 112,89 87.675,89.575 109,90 84,91 96,91 87.8,91.25 116.9,91.575 111.95,91.65 114.975,91.7 84,94 98.15,94.575 100.175,94.7 114.475,97.225 98,98 101,98 113.95,99.3 114,101 88,102 93,102 102,102 108,102
  other v2: 98.3,81.3 99.4,81.3 100.5,81.3 101.6,81.3 102.7,81.3 98.3,82.4 99.4,82.4 100.5,82.4 101.6,82.4 102.7,82.4 98.3,83.5 99.4,83.5 100.5,83.5 101.6,83.5 102.7,83.5 98.3,84.6 99.4,84.6 100.5,84.6 101.6,84.6 102.7,84.6 98.3,85.7 99.4,85.7 100.5,85.7 101.6,85.7 102.7,85.7 92.7,94.95 93.8,94.95 92.7,96.05 93.8,96.05
"IMU CPOUT": C18.2 U3.20 | length 1.3
  first layer (signal) w0.3: U3.20 C18.2
"IMU INT": U2.45 U3.12 | length 15.5
  first layer (signal) w0.3: U3.12 91.25,94.225 91,94.225 91,93.85 90.25,93.1 90.25,91.25 91.575,89.925 98.104,89.925 98.25,89.779 98.25,89.149 99.025,88.374 99.025,87.572 99.225,87.372 99.225,87.165 99.225,86.925 U2.45
"IMU REGOUT": C16.2 U3.10 | length 1.6
  first layer (signal) w0.3: C16.2@89.75,95 89.8,95 90.05,95.25 U3.10
"IMU SCL": R3.1 U2.42 U3.23 | length 16.6
  first layer (signal) w0.25: U3.23 95.785,96.25 95.936,96.099 96.185,95.85 99.843,95.85 99.901,95.908 100.083,95.908 v1(100.15,95.975) ; v1(101.725,95.9) 101.725,95.889 102.25,95.364 R3.1
  first layer (signal) w0.3: U2.42 100.75,87.6 102.25,89.1 R3.1
  fourth layer (signal) w0.25: v1(100.15,95.975) 100.188,95.937 101.688,95.937 v1(101.725,95.9)
"IMU SDA": R4.1 U2.43 U3.24 | length 15.8
  first layer (signal) w0.3: U3.24 100.854,96.75 101,96.604 101,91.525 100.779,91.304 R4.1@100.779,90.779 ; U2.43 100.25,88.149 100.261,88.159 100.75,88.649 R4.1
"MCU BOOT 0": R7.1 U2.44 | length 1.8
  first layer (signal) w0.25: U2.44 99.75,87.175 R7.1
"MCU LED A": D2.A U2.26 | length 1.4
  first layer (signal) w0.3: U2.26 103.912,81.263 105.263,81.263 D2.A@105.275,81.275
"MCU NRST": C14.2 R6.2 SWD.3 U2.7 | length 32.3
  first layer (signal) w0.25: v1(94.175,82.7) 94.184,82.7 94.709,83.225 96.547,83.225 96.572,83.2 96.775,83.2 96.825,83.25 U2.7 ; C14.2 107.9,99.025 108.567,98.358 108.567,98.001 v1(108.634,97.934) ; C14.2@107.95,99.025 108.125,99.2 109.275,99.2 R6.2 109.425,97.239 109.367,97.181 109.367,96.918 SWD.3
  fourth layer (signal) w0.25: v1(94.175,82.7) 94.175,87.15 103.175,96.15 107.453,96.15 108.612,97.309 108.612,97.913 v1(108.634,97.934)
"MCU OSC IN": C5.2 U2.5 X1.1 | length 15.3
  first layer (signal) w0.25: X1.1 90.618,76.55 90.75,76.682 90.75,80.25 C5.2 90.25,83 91.5,84.25 U2.5 ; C5.2@90.25,80.7 C5.2@90.425,80.525
"MCU OSC OUT": R2.2 U2.6 | length 5.2
  first layer (signal) w0.25: 92.75,82.25 92.908,82.408 92.908,82.783 93.875,83.75 U2.6
"MCU PA4": GPIO.2 U2.14 | length 14.9
  first layer (signal) w0.25: GPIO.2 94,74.85 98.25,79.1 U2.14
"MCU PA5": GPIO.3 U2.15 | length 14.5
  first layer (signal) w0.25: GPIO.3 95.425,67.175 95.425,74.425 98.75,77.75 U2.15
"MCU PA6": GPIO.4 U2.16 | length 14.2
  first layer (signal) w0.25: GPIO.4 96.5,74.5 99.25,77.25 U2.16
"MCU PA7": GPIO.5 U2.17 | length 13.9
  first layer (signal) w0.25: GPIO.5 97.95,67.2 97.95,67.807 98,67.857 98,74.75 99.75,76.5 U2.17
"MCU SWCLK": SWD.4 U2.37 | length 10.8
  first layer (signal) w0.3: U2.37 103.25,87.575 109.27,93.595 SWD.4@109.27,95.23
"MCU SWDIO": SWD.2 U2.34 | length 14.7
  first layer (signal) w0.3: U2.34@104.15,85.25 105.837,85.25 105.863,85.225 107.55,85.225 110.54,88.215 SWD.2@110.54,95.23
"MCU SWO": SWD.6 U2.39 | length 10.7
  first layer (signal) w0.3: U2.39 102.25,88.05 108,93.8 SWD.6@108,95.23
"MCU VCAP1": C13.2 U2.22 | length 2
  first layer (signal) w0.3: C13.2 102.225,78.475 102.225,80.075 U2.22
NetD1_K: D1.K R1.2 | length 1.6
  first layer (signal) w0.25: D1.K 119.65,70.65 119.65,71.85 R1.2
NetD2_K: D2.K R5.2 | length 1.2
  first layer (signal) w0.3: R5.2@106.275,80.075 D2.K@106.275,81.275
USB_D_N: U2.32 USB.2 | length 15.2
  first layer (signal) w0.254: U2.32 103.902,84.252 117.852,84.252 118.102,84.002 118.842,84.002 USB.2
USB_D_P: U2.33 USB.3 | length 14.8
  first layer (signal) w0.254: U2.33@104.173,84.748 USB.3@118.938,84.748
VBUS: C1.2 FB1.1 USB.1
"XTAL  IN": C6.2 R2.1 X1.3 | length 3.9
  first layer (signal) w0.25: 91.75,82.25 C6.2 91.75,78.6 X1.3
pads on no net: GPIO. SWD.MH U2.2 U2.3 U2.4 U2.10 U2.11 U2.12 U2.13 U2.18 U2.19 U2.20 U2.21 U2.25 U2.27 U2.28 U2.29 U2.30 U2.31 U2.38 U2.40 U2.41 U2.46 U3.2 U3.3 U3.4 U3.5 U3.6 U3.7 U3.14 U3.15 U3.16 U3.17 U3.19 U3.21 U3.22 USB.4 USB.6 USB.7 USB.8 USB.9 USB.10 USB.11

## Polygon pours and split planes (outlines as drawn)
5V on first layer (signal) "5V_L01_P002" (solid, pour order 2): 114.792,83.643 108.4,83.543 108.4,81.3 108.4,80.9 108.4,74 110.25,74 110.25,79.4 111.5,79.4 112.9,80.8 114.792,80.8
3.3v on first layer (signal) "3.3V_L01_P003" (solid, pour order 3): 110.625,75.7 110.625,70.125 109.5,69 109.5,67.1 117.7,67.1 117.7,71.5 112.125,71.5 112.125,75.7
GND on first layer (signal) "GND_L01_P007" (solid, pour order 7): 116.5,80.5 116.5,78 113.75,78 113.75,77 116.25,74.5 117.75,74.5 119,73.25 119,71.5 118,71.5 117.75,71.75 115.5,71.75 112.99,74.26 ccw(c112.785,74.162) 112.75,74.387 112.75,76.5 110.75,76.5 110.75,78.75 111.25,78.75 113,80.5
VBUS on first layer (signal) "VBUS_L01_P000" (solid, pour order 0): 119.85,83.725 115.275,83.725 115.15,83.6 115.15,80.8 116.65,80.8 117.35,81.5 117.35,83.1 119.85,83.1
GND on second layer (GND) "GND_L02_P005" (solid, pour order 5): 121.5,102 cw(c121.5,101.5) 122,101.5 122,63.5 cw(c121.414,63.457) 121.6,62.9 83.754,62.9 cw(c83.65,63.743) 83.584,62.896 cw(c83.627,63.455) 83.067,63.455 83.067,101.313 cw(c84.11,100.956) 83.754,102
GND on third layer (GND) "GND_L03_P006" (solid, pour order 6): 121.483,102.052 cw(c121.483,101.552) 121.983,101.552 121.983,63.552 cw(c121.397,63.51) 121.583,62.952 83.736,62.952 cw(c83.633,63.795) 83.567,62.948 cw(c83.61,63.507) 83.05,63.507 83.05,101.365 cw(c84.093,101.009) 83.736,102.052

## Silkscreen, mask and mechanical layers (free items; w line width, h text height)
Top Overlay:
  drawing of 42 lines, arcs and shapes, not listed
Mechanical 1:
  lines w0.254: 82,100 82,101.73 cw(c83.27,101.73) 83.27,103 84,103 121.73,103 cw(c121.73,101.73) 123,101.73 123,63.27 cw(c121.73,63.27) 121.73,62 83.27,62 cw(c83.27,63.27) 82,63.27 82,101.586

## Text inside footprints (layer, text, board x,y; h text height)
D1: Mechanical 13 "+" at 117.117,71.008 h0.5
D2: Mechanical 13 "+" at 103.917,81.733 h0.5